# Altium PCB T_CAN.PcbDoc
Units mm, origin at the board's own origin, x right, y up, seen from the top; angles counter-clockwise.
Board outline 48 x 31.75 mm, 2 copper layers (Top Layer, Bottom Layer), stack 1.671 mm thick; 4 components, 5 nets, 26 pads, 0 vias.
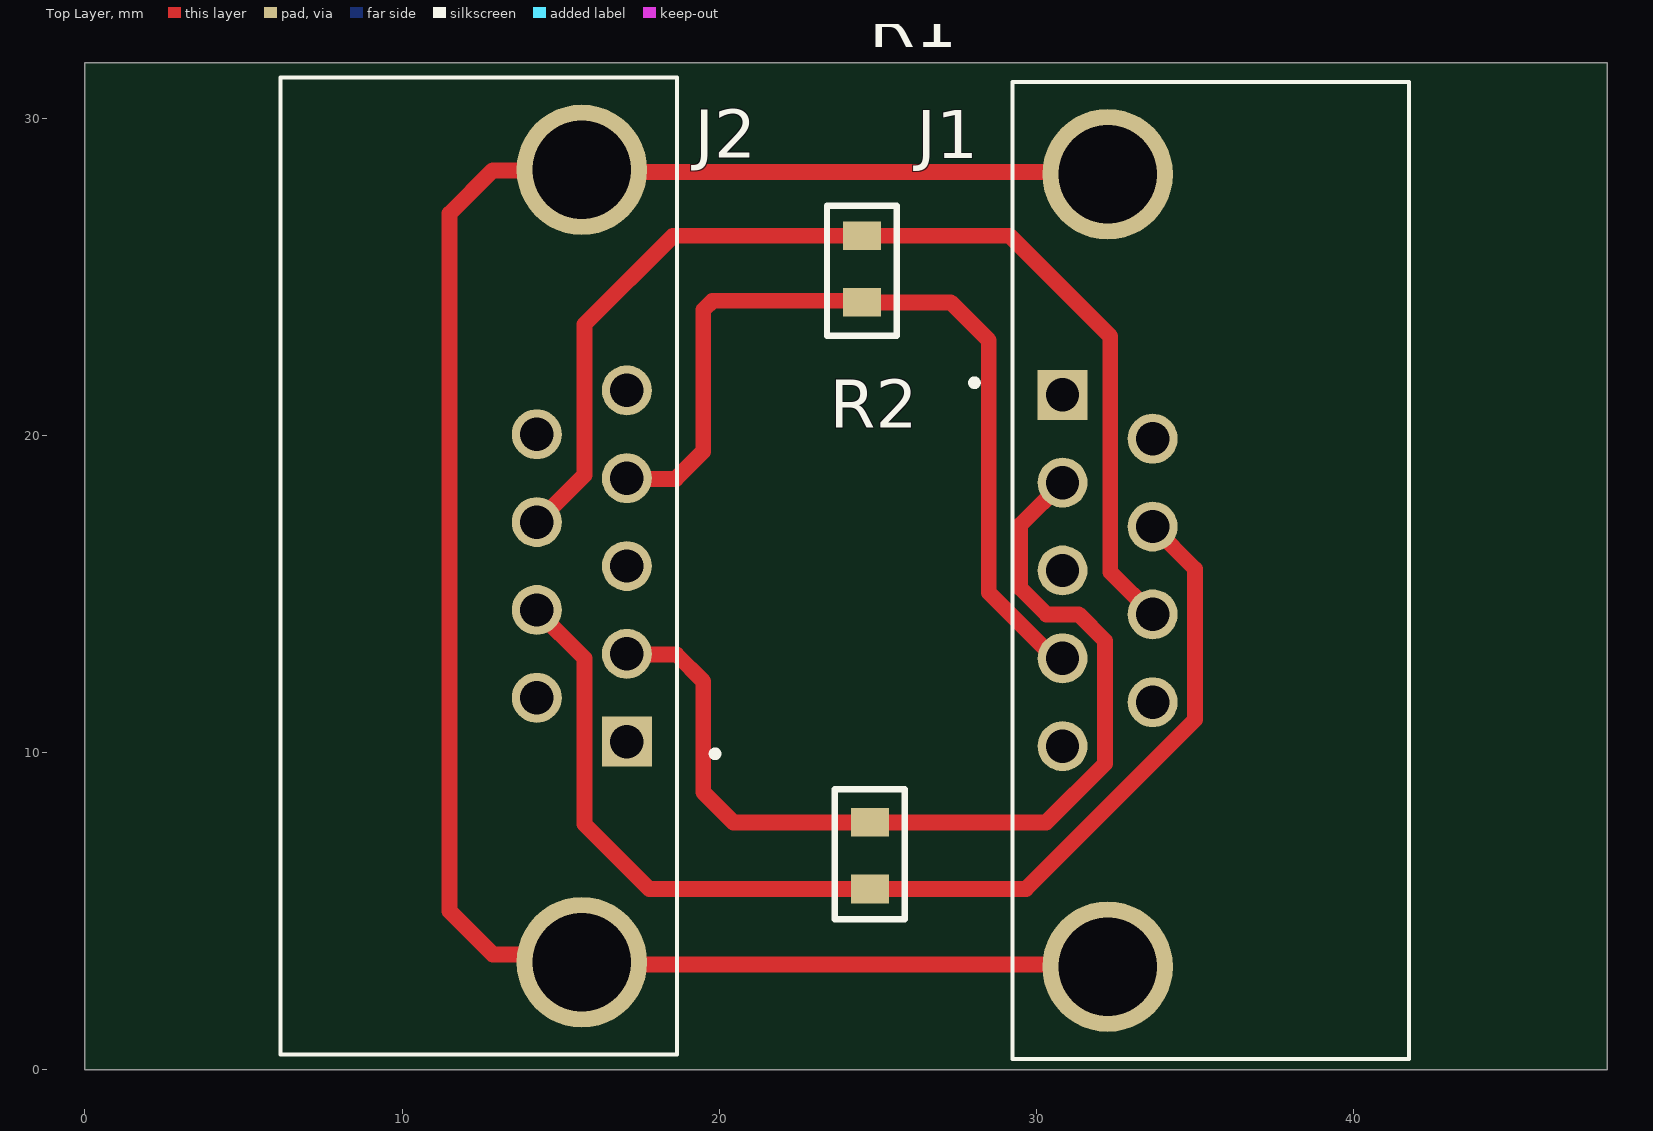
[diagram p0: Top Layer view]
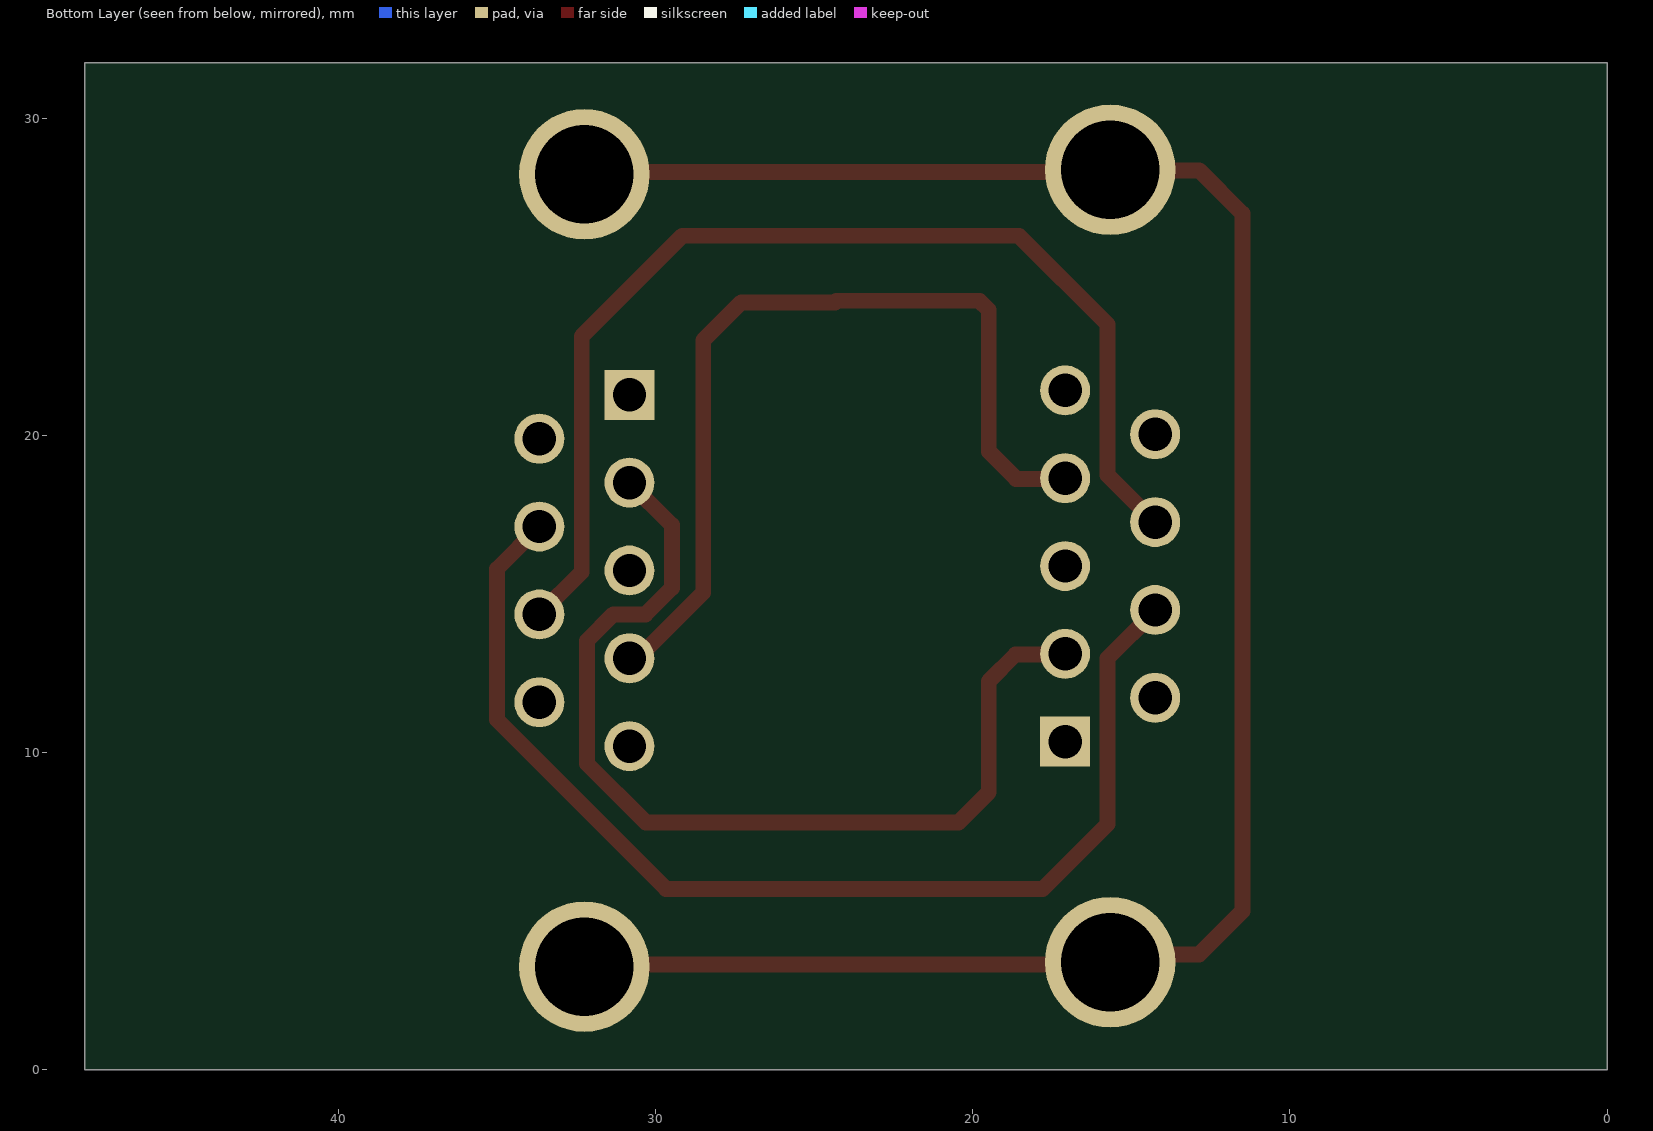
[diagram p1: Bottom Layer view, seen from below]
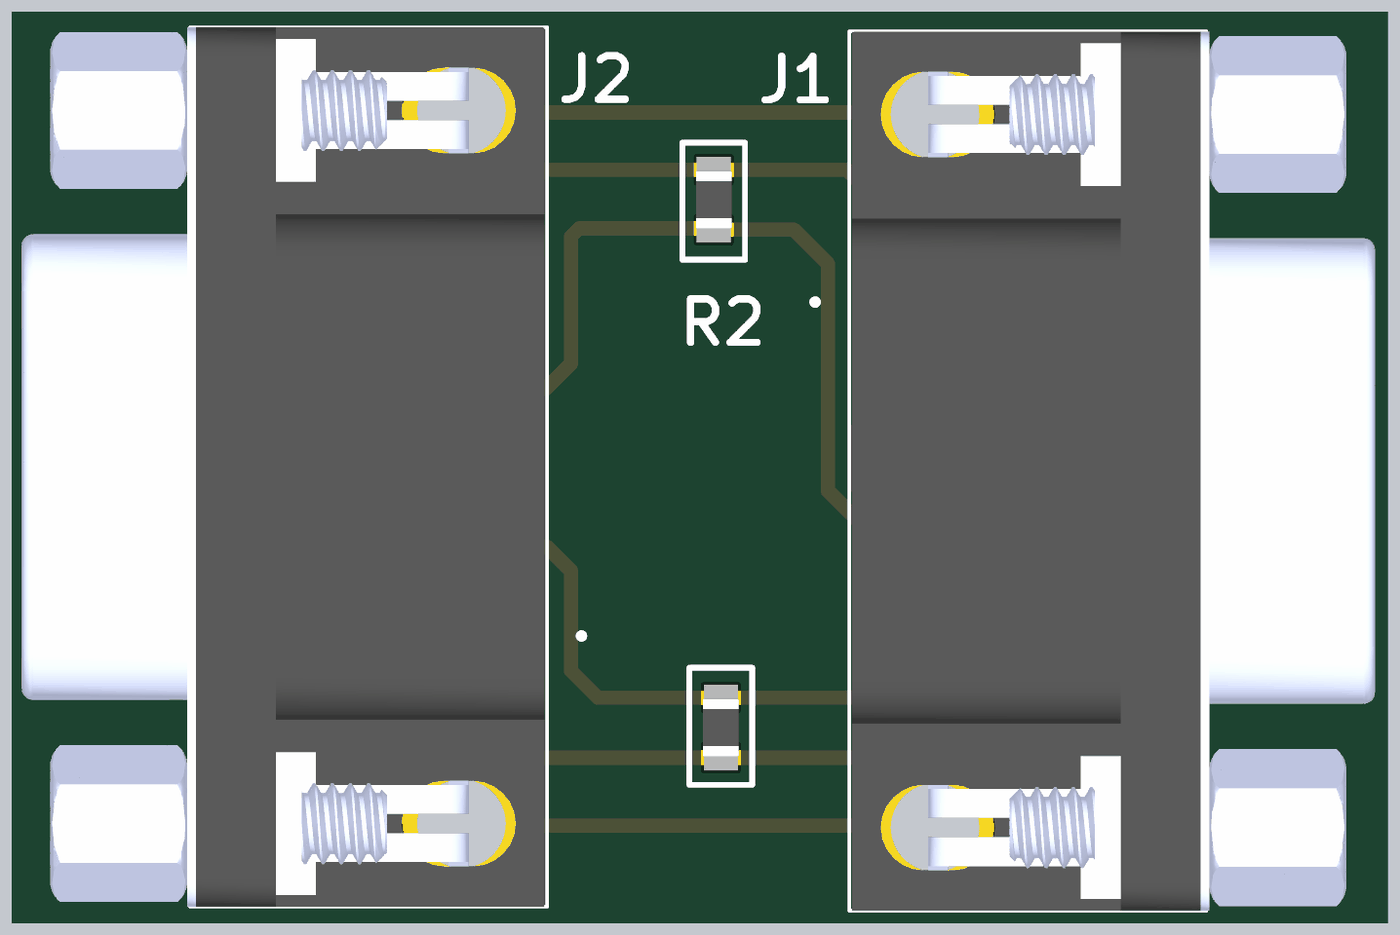
[diagram p2: 3D render of the assembled board from above, using the file's embedded part models]

## Layer stack, top to bottom
Top Solder: solder mask 0.0102, Solder Resist, Dk 3.5
Top Layer: signal copper 0.0356
Dielectric 1: dielectric 1.6, FR-4, Dk 4.8
Bottom Layer: signal copper 0.0356
Bottom Solder: solder mask 0.0102, Solder Resist, Dk 3.5

## Board outline
0,0 48,0 48,31.75 0,31.75

## Design rules (kind name [scope] priority, off if disabled: settings)
Clearance [All] p1: gap=0.3 ignorepadtopadclearanceinfootprint=FALSE
HoleSize [All] p1: absolutevalues=TRUE maxlimit=3.2 minlimit=0.025 maxpercent=80.000 minpercent=20.000
PolygonConnect [All] p1: connectstyle=Relief reliefconductorwidth=0.254 reliefentries=4 polygonreliefangle="90 Angle" airgapwidth=0.254
RoutingVias [All] p1: holewidth=0.3 width=0.6 viastyle="Through Hole" minholewidth=0.3 minwidth=0.6 maxholewidth=0.3 maxwidth=0.6
SilkToSolderMaskClearance [IsPad] p1: minsilkscreentomaskgap=0.1 clearancetoexposedcopper=TRUE
SolderMaskExpansion [All] p1: expansion=0.102 istentingtop=FALSE
Width [All] p1: maxlimit=1 minlimit=0.3 preferedwidth=0.5
28 further rules are at their usual default settings.

## Components (designator, comment, footprint, x,y, rotation, side; value= is the part's Value field where it differs from the comment)
J1 "D-sub" ASSMANN_A-DF_09_A_KG-T2S 32.25,15.745 r90 top
J2 "D-sub" ASSMANN_A-DF_09_A_KG-T2S 15.67,15.885 r270 top
R1 "120 ohm" R0805 24.75,6.75 r90 top value=120R
R2 "120 ohm" R0805 24.5,25.25 r270 top value=120R

## Footprints (in the part's own frame and the unit in brackets; to place one, negate y for a bottom-side part, rotate by r counter-clockwise, add the part's x,y. Pads: shape width x height; smd on the part's side, far side on the other; paste and mask are expansions set on the pad)
ASSMANN_A-DF_09_A_KG-T2S [mm]
  rect 1.575x1.575 / inner round 1.575 / far side rect 1.575x1.575 hole 1.05: 1(5.54,1.42)
  round 1.575 hole 1.05: 2(2.77,1.42) 3(0,1.42) 4(-2.77,1.42) 5(-5.54,1.42) 6(4.155,-1.42) 7(1.385,-1.42) 8(-1.385,-1.42) 9(-4.155,-1.42)
  round 4.116 hole 3.1: S1(-12.495,0) S2(12.495,0)
  silkscreen extent -15.41,-9.5 15.41,4.3, body extent -15.41,-15.4 15.41,2.9, height 12.8
R0805 [mm]
  rect 0.9x1.2 smd: 1(-1.05,0) 2(1.05,0)
  silkscreen extent -2,-1.1 2.1,1.1, body extent -1,-0.63 1,0.63, height 0.61

## Part data
J1 J2: library part A-DF_09_A_KG-T2S, "9 Position D-Sub Receptacle, Female Sockets Connector", Package=None, Check_prices=https://www.snapeda.com/parts/A-DF%2009%20A/KG-T2S/Assmann+WSW+Components/view-part/?ref=eda, MF="Assmann WSW", MP="A-DF 09 A/KG-T2S", SnapEDA_Link=https://www.snapeda.com/parts/A-DF%2009%20A/KG-T2S/Assmann+WSW+Components/view-part/?ref=snap
R1 R2: library part AC0805FR-7W120RL, "Chip Resistor Automotive Grade Thick Film 0805 120Ohm 1% Paper T/R", Case/Package=339Case, Manufacturer=Yageo, Supplier Part Number=13-AC0805FR-7W120RLCT-ND, Category="Chip SMD Resistors", Manufacturer Part Number=AC0805FR-7W120RL, Packaging=10Packaging, Pricing="1=0,1, 10=0,048, 50=0,0318, 100=0,0269, 500=0,01894, 1000=0,01649 (USD)", RoHS=Yes, Stock=9211, Supplier=Digikey

## Nets (pads, with @x,y where several pads share a name; then routed paths per layer and width w, separated by ;. In a path a pad name is that pad's centre, name@x,y a point inside that pad or via, vN(x,y) a via of type N, cw(c..) or ccw(c..) an arc to the next point about the centre after c; other vN are vias at no path point)
NetJ1_2: J1.2 J2.2 R1.2 | length 31.2
  Top Layer w0.5: J2.2@17.09,13.095 18.655,13.095 19.5,12.25 19.5,8.75 20.45,7.8 R1.2 30.317,7.8 32.167,9.651 32.167,13.529 31.337,14.36 30.323,14.36 29.492,15.191 29.492,17.177 J1.2
NetJ1_4: J1.4 J2.4 R2.2 | length 28
  Top Layer w0.5: J2.4@17.09,18.635 18.635,18.635 19.5,19.5 19.5,23.957 19.793,24.25 24.3,24.25 24.35,24.2 R2.2 27.3,24.2 28.5,23 28.5,15.052 30.577,12.975 J1.4
NetJ1_7: J1.7 J2.7 R1.1 | length 36.3
  Top Layer w0.5: J2.7@14.25,14.48 15.752,12.978 15.752,7.748 17.8,5.7 R1.1 29.672,5.7 35.007,11.036 35.007,15.793 J1.7
NetJ1_8: J1.8 J2.8 R2.1 | length 35.3
  Top Layer w0.5: J2.8@14.25,17.25 15.75,18.75 15.75,23.5 18.55,26.3 R2.1 29.162,26.3 32.332,23.129 32.332,15.697 J1.8
NetJ1_S1: J1.S1 J1.S2 J2.S1 J2.S2 | length 64.9
  Top Layer w0.5: J1.S1 32.18,3.32 15.74,3.32 J2.S2 15.422,3.638 12.862,3.638 11.5,5 11.5,27 12.862,28.362 15.652,28.362 J2.S1 15.74,28.31 32.18,28.31 J1.S2
pads on no net: J1.1 J1.3 J1.5 J1.6 J1.9 J2.1 J2.3 J2.5 J2.6 J2.9

## Silkscreen, mask and mechanical layers (free items; w line width, h text height)
Board:
  the board outline again, w0.2